# Altium PCB PCB1.PcbDoc
Units mil, origin at the board's own origin, x right, y up, seen from the top; angles counter-clockwise.
Board outline 2740 x 1570 mil, 2 copper layers (Top Layer, Bottom Layer); 18 components, 21 nets, 53 pads, 6 vias.
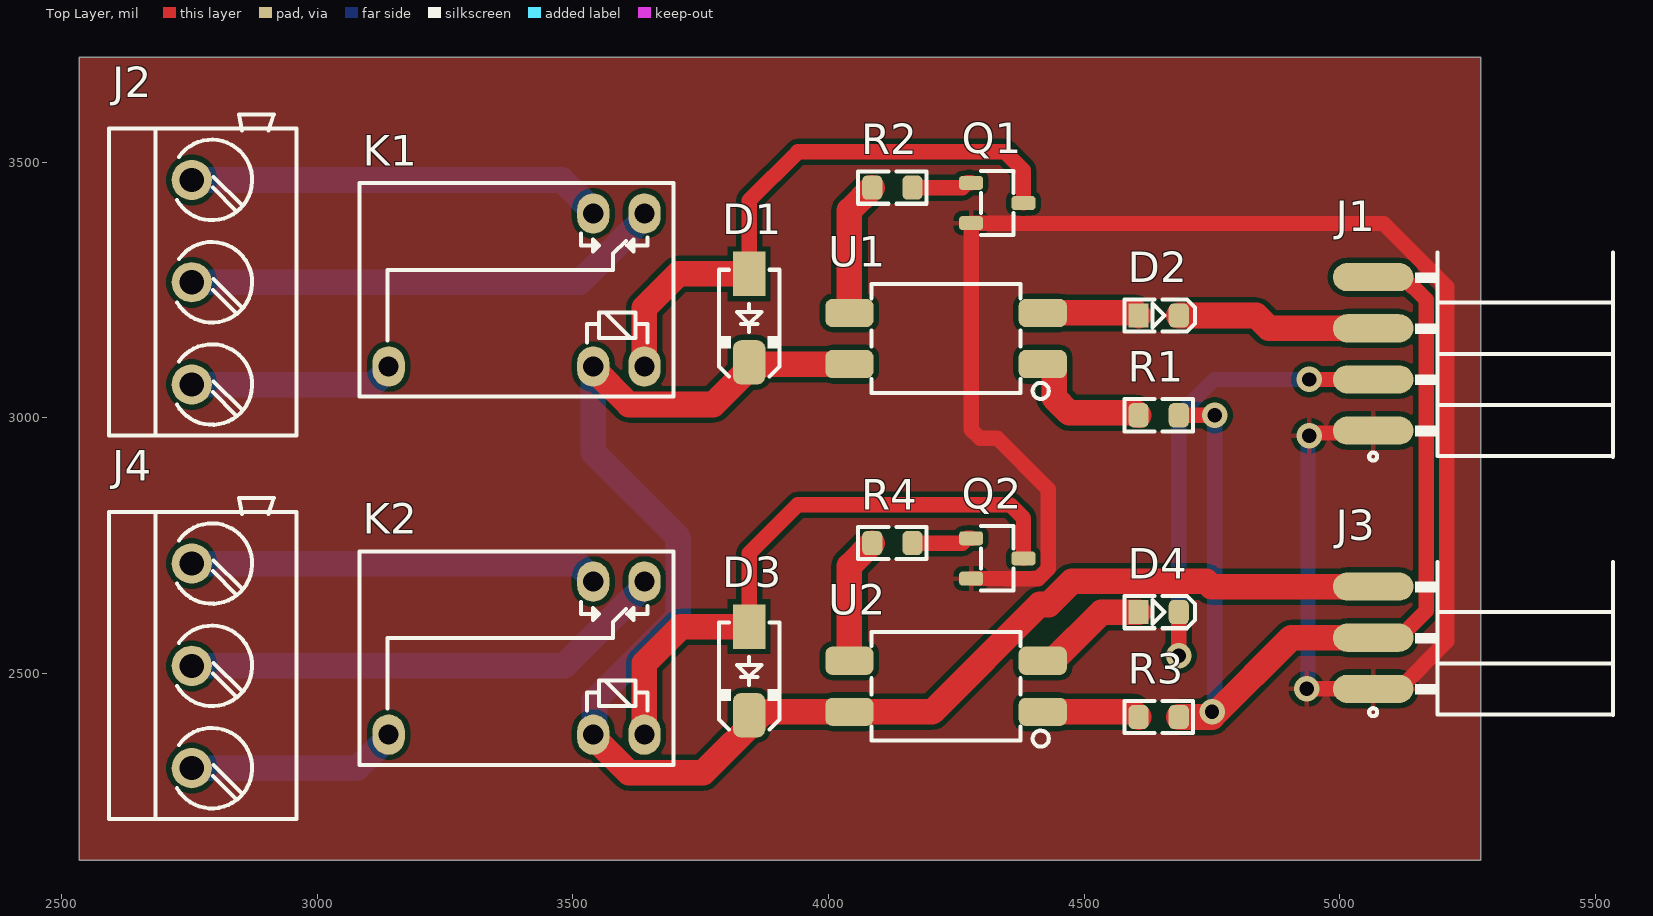
[diagram p0: Top Layer view]
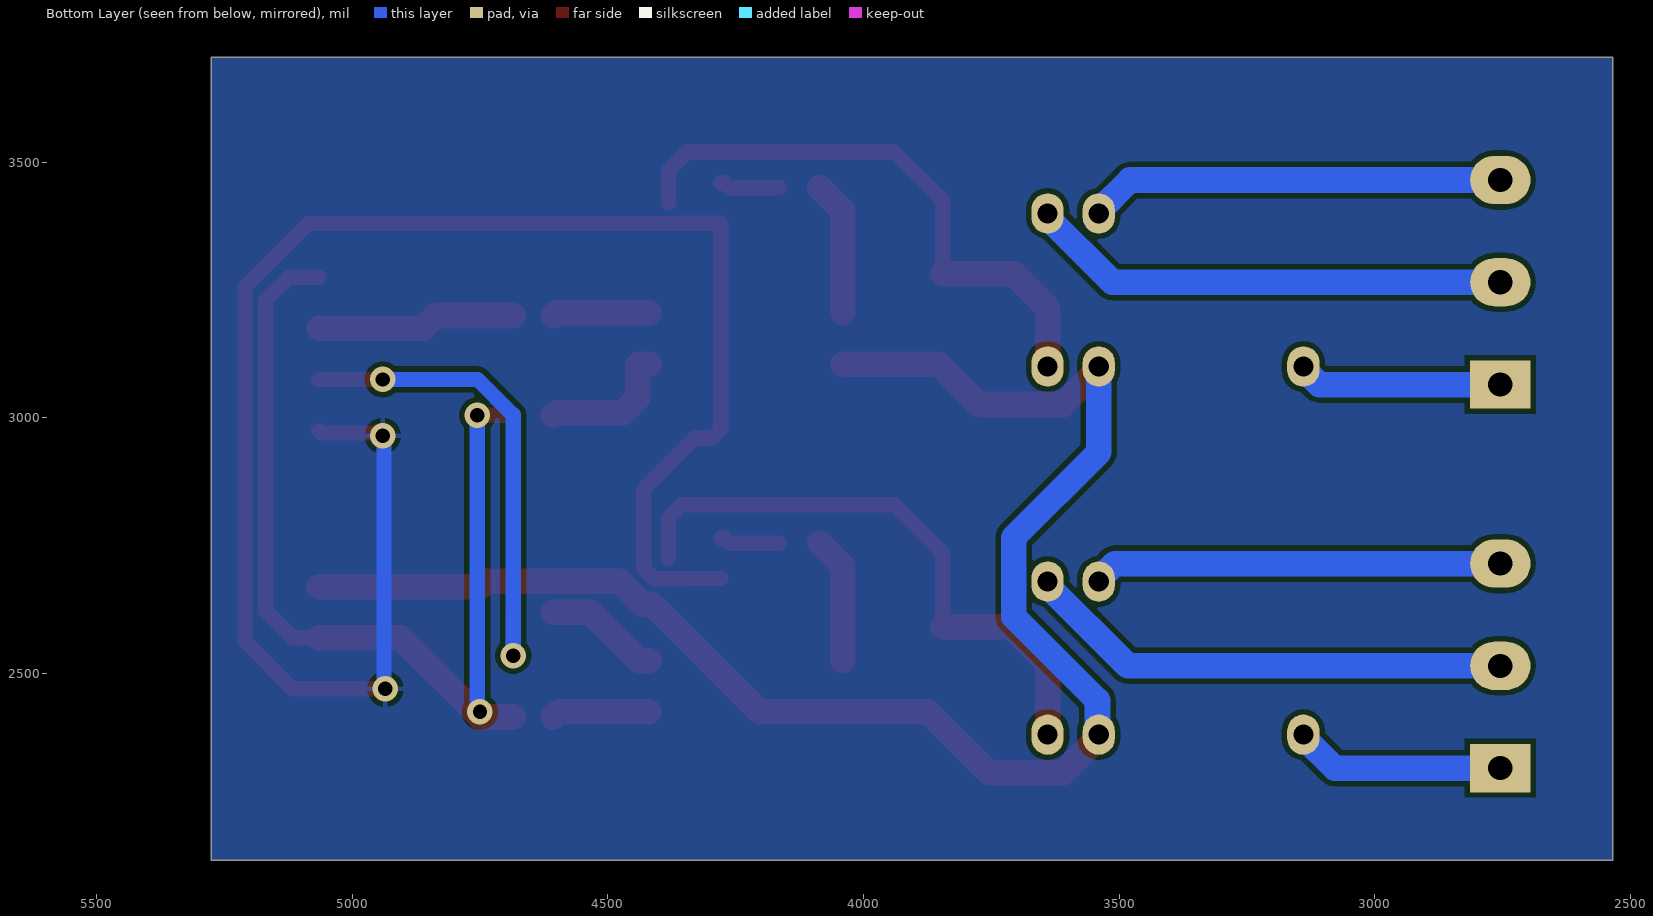
[diagram p1: Bottom Layer view, seen from below]

## Layer stack, top to bottom
Top Solder: solder mask 0.4, Solder Resist, Dk 3.5
Top Layer: signal copper 1.4
Dielectric 1: dielectric 12.6, FR-4, Dk 4.8
Bottom Layer: signal copper 1.4
Bottom Solder: solder mask 0.4, Solder Resist, Dk 3.5

## Board outline
2535,2135 5275,2135 5275,3705 2535,3705

## Design rules (kind name [scope] priority, off if disabled: settings)
Clearance [All] p1: gap=10 ignorepadtopadclearanceinfootprint=FALSE
PolygonConnect [All] p1: connectstyle=Relief reliefconductorwidth=10 reliefentries=4 polygonreliefangle="90 Angle" airgapwidth=10
RoutingVias [All] p1: holewidth=28 width=50 viastyle="Through Hole" minholewidth=28 minwidth=50 maxholewidth=28 maxwidth=50
SolderMaskExpansion [All] p1: expansion=4 istentingtop=FALSE
SupplyNets "Schematic Supply Nets" [InNet('GND')] p1: voltage=0.000
Width [All] p1: maxlimit=50 minlimit=10 preferedwidth=30 minimp=50.000000 maximp=50.000000 favimp=50.000000
30 further rules are at their usual default settings.

## Components (designator, comment, footprint, x,y, rotation, side; value= is the part's Value field where it differs from the comment)
D1 "1N4003" D_SMA 3845,3195 r270 top
D2 "LED805WHT" LED0805WHT 4645.63,3200 r0 top
D3 "1N4003" D_SMA 3845,2505 r270 top
D4 "LED805WHT" LED0805WHT 4645.63,2620 r0 top
J1 "HDRF4" HDRRS_F_1X4 5065,3125 r270 top
J2 "CONN_TB3" TBB_3 2755,3265 r90 top
J3 "HDRF3" HDRRS_F_1X3 5065,2570 r270 top
J4 "CONN_TB3" TBB_3 2755,2515 r90 top
K1 "RELAY_SPDT" REL_SPDT_5_1611 3390,3250 r90 top
K2 "RELAY_SPDT" REL_SPDT_5_1611 3390,2530 r90 top
Q1 "MMBTA42" SOT23_3 4330,3420 r0 top
Q2 "MMBTA42" SOT23_3 4330,2725 r0 top
R1 "1K0" R0805 4645.63,3005 r0 top
R2 "512 ohms" R0805 4125,3450 r0 top
R3 "1K0" R0805 4645.63,2415 r0 top
R4 "512 ohms" R0805 4125,2755 r0 top
U1 "EL817" DIP_4SMD 4230,3155 r180 top
U2 "EL817" DIP_4SMD 4230,2475 r180 top

## Footprints (in the part's own frame and the unit in brackets; to place one, negate y for a bottom-side part, rotate by r counter-clockwise, add the part's x,y. Pads: shape width x height; smd on the part's side, far side on the other; paste and mask are expansions set on the pad)
D_SMA [mm] "SMA Molded Diode, 2-Leads, Body 4.3x2.7mm, SOD-128"
  rect 2.2x1.6 smd paste-0.1: 1(-2.2,0)
  rrect50% 2.2x1.6 smd paste-0.1: 2(2.2,0)
  silkscreen extent -2.4,-1.5 2.9,1.5, body extent -2.75,-1.4 2.75,1.4, height 2.6
DIP_4SMD [mm] "DIP4, pitch 2.54mm, 300mil Width SMD"
  rrect50% 2.4x1.4 smd: 1(-4.8,1.27) 2(-4.8,-1.27) 3(4.8,-1.27) 4(4.8,1.27)
  silkscreen extent -5.1,-2.7 3.7,3, body extent -5.23,-2.55 5.23,2.55, height 4.6
HDRRS_F_1X3 [mm] "Connector; Header; 3 Position"
  oval 1.4x4 smd mask+0.1: 1(2.54,0) 2(0,0) 3(-2.54,0)
  silkscreen extent -3.77,-0.2 3.9,11.9, body extent -4.08,-1.7 3.96,11.8, height 2.58
HDRRS_F_1X4 [mm] "Connector; Header; 4 Position"
  oval 1.4x4 smd mask+0.1: 1(3.81,0) 2(1.27,0) 3(-1.27,0) 4(-3.81,0)
  silkscreen extent -5.04,-0.2 5.3,11.9, body extent -5.33,-1.7 5.33,11.8, height 2.58
LED0805WHT [mm] "LED SMD 0805, WHITE"
  rect 1x1.2 smd paste-2 mask+0.075: 1(-1,0)
  rrect50% 1x1.2 smd paste-2 mask+0.075: 2(1,0)
  Top Layer pour cut-out: -0.5,0.8 0.5,0.8 0.5,-0.8 -0.5,-0.8
  silkscreen extent -1.7,-0.8 1.8,0.8, body extent -1,-0.63 1,0.63, height 0.7
R0805 [mm] "CHIP RESISTOR 1/8 WATT ,2.0X1.3mm, 0805, 2012"
  rrect50% 1x1.2 smd paste-0.1 mask+0.075: 1(-1,0) 2(1,0)
  Top Layer pour cut-out: -0.5,0.8 0.5,0.8 0.5,-0.8 -0.5,-0.8
  silkscreen extent -1.7,-0.8 1.7,0.8, body extent -1.15,-0.67 1.15,0.68, height 0.76
REL_SPDT_5_1611 [mm] "RELAY, SPDT, 15.7X11X12mm, TRBS"
  oval 2x1.6 hole 1: 1(-3.8,6.35) 2(3.8,-6.35) 3(3.8,-3.81) 4(-3.8,-3.81) 5(-3.8,-6.35)
  silkscreen extent -5.3,-7.8 5.3,7.8, body extent -5.2,-7.7 5.2,7.7, height 11.81
SOT23_3 [mm] "SOT-23, Micro3, MO-178, TO-236AB, MO-193C, SuperSOT3, SC-59, 1.5x3mm, Pitch 1.9mm"
  rrect50% 1.2x0.7 smd paste-0.05 mask+0.1: 1(-1.3,1) 2(-1.3,-1) 3(1.3,0)
  silkscreen extent -0.8,-1.6 0.8,1.6, body extent -1.32,-1.5 1.32,1.5, height 1.08
TBB_3 [mm] "Terminal Block Blue"
  round 2 / inner round 2 / far side rect 2.4x3 hole 1.2: 1(-5.08,0)
  round 2 / inner round 2 / far side oval 2.4x3 hole 1.2: 2(0,0) 3(5.08,0)
  silkscreen extent -7.6,-5.2 8.34,4.1, body extent -7.49,-5.07 8.33,4, height 12.78

## Part data
D1 D3: library part DIODE_SMD_1N4003, "DIODE, GENERAL PURPOSE, 200V/1A", ASSEMBLY=ASSEMBLY, DESC=DESCRIPTION, MANF=MANF, MANF_P#=1N4003, PARAM="200V VRRM", PARAM2=1A, PRICE=PRICE
D2 D4: library part LED_SMD_0805_WHT, "LED, SMD, 0805, WHITE", ASSEMBLY=ASSEMBLY, DESC=DESCRIPTION, MANF=MANF, MANF_P#=MANF_PART#, PARAM2=2.2V, PRICE=36t@Javan
J1: library part HDRRS_F_1X4, "CONN, HEADER, Female, pitch: 2.54mm, 4POS"
J2 J4: "CONN, TERMINAL BLOCK, 5.08mm pitch"
J3: library part HDRRS_F_1X3, "CONN, HEADER, Female, pitch: 2.54mm, 3POS"
K1 K2: library part RELAY_SPDT_5_1611_TRBS, "Relay, SPDT, 5P, 15.5X11mm, TRB 125VAC/1A", MANF=TTI, MANF_P#=TRBS-6VDC-SA-CL, PARAM="12V, 17mA, 720Ohm", PARAM2="1A, 125VAC/30VDC", PRICE=-
Q1 Q2: library part NPN_MMBTA42_SOT23, "BJT, NPN, 300v, 0.5A, SMD, SOT23", MANF=ON/FAIRCHILD, MANF_P#=MMBTA42, PARAM="300v, 0.5A", PARAM2=625mW
R1 R2 R3 R4: library part RES_SMD_0805, "RESISTOR, SMD", ASSEMBLY=ASSEMBLY, DESC=DESCRIPTION, DIST#=MOUSER, MANF=-, MANF_P#=-, PARAM=-W, PARAM2=1%, PRICE="100= 0.5$"
U1 U2: library part OPTC_TR4P_EL817_SMD, "OPTOCOUPLER, TRANSISTOR, 4PIN", Package=DIP-4SMD, PARAM=IF=5mA, PARAM2="VCE = 5V", PRICE=300t@Paya

## Via types
v1: diameter 50, hole 28, Top Layer to Bottom Layer, 6 vias

## Nets (pads, with @x,y where several pads share a name; then routed paths per layer and width w, separated by ;. In a path a pad name is that pad's centre, name@x,y a point inside that pad or via, vN(x,y) a via of type N, cw(c..) or ccw(c..) an arc to the next point about the centre after c; other vN are vias at no path point)
GND: J1.1 J3.1 Q1.2 Q2.2 | length 3531.2
  Top Layer w30: Q2.2 4347.44,2685.63 4348.07,2685 4409.9,2685 4429.8,2704.9 4429.8,2860.2 4330,2960 4296.39,2960 4278.82,2977.57 Q1.2 4363.98,3380.63 4364.61,3380 5085.51,3380 5208.74,3256.77 5208.74,2562.56 5116.18,2470 J3.1 v1(4935,2470) ; v1(4940,2965) 4945.41,2965 4950.61,2970.19 5060.19,2970.19 J1.1
  Bottom Layer w30: v1(4935,2470) 4937.5,2472.5 4937.5,2962.5 v1(4940,2965)
NetD1_1: D1.1 K1.5 Q1.3 | length 1144.9
  Top Layer w30: D1.1 3845,3425 3940,3520 4345,3520 4381.18,3483.82 Q1.3
  Top Layer w50: K1.5 3640,3215 3706.61,3281.61 D1.1
NetD1_2: D1.2 D3.2 J3.3 K1.4 K2.4 U1.4 U2.4 | length 3142.4
  Top Layer w50: K2.4 3540,2376.04 3610.01,2306.02 3754.91,2306.02 3873.88,2425 U2.4 4202.75,2425 4412.75,2635 4430.61,2635 4475.61,2680 4738.53,2680 4748.53,2670 J3.3 ; K1.4 3540,3096.04 3610.01,3026.02 3774.91,3026.02 3853.88,3105 U1.4
  Bottom Layer w50: K2.4 3542.49,2382.88 3542.49,2447.49 3706.5,2611.5 3706.5,2765.76 3540,2932.26 K1.4
NetD2_1: D2.1 U1.2 | length 189.4
  Top Layer w50: U1.2 4601.26,3205 D2.1
NetD2_2: D2.2 J1.3 | length 390.4
  Top Layer w50: D2.2 4836.22,3200 4861.22,3175 J1.3
NetD3_1: D3.1 K2.5 Q2.3 | length 1182.9
  Top Layer w30: D3.1 3845,2735 3940,2830 4355,2830 4381.18,2803.82 Q2.3
  Top Layer w50: K2.5 3640,2520 3711.61,2591.61 D3.1
NetD4_1: D4.1 U2.2 | length 226.6
  Top Layer w50: U2.2 4438.66,2525 4533.66,2620 D4.1
NetD4_2: D4.2 J1.2 | length 964.4
  Top Layer w30: v1(4685,2535) D4.2 ; v1(4940,3075) J1.2
  Bottom Layer w30: v1(4685,2535) 4685,3005.71 4754.29,3075 v1(4940,3075)
NetJ1_4: J1.4 J3.2 R1.2 R3.2 | length 1945.3
  Top Layer w30: R1.2 v1(4755,3005) ; J3.2 5116.18,2570 5168.74,2622.56 5168.74,3231.26 5145,3255 5142.98,3255 5122.98,3275 J1.4
  Top Layer w50: R3.2 v1@4750,2415 ; v1@4755,2420 4905,2570 J3.2
  Bottom Layer w30: v1(4750,2425) 4755,2430 v1(4755,3005)
NetJ2_1: J2.1 K1.1 | length 402.2
  Bottom Layer w50: J2.1 3108.96,3065 3140,3096.04 K1.1
NetJ2_2: J2.2 K1.2 | length 945.4
  Bottom Layer w50: J2.2 3513.27,3265 3640,3391.73 K1.2
NetJ2_3: J2.3 K1.3 | length 814.6
  Bottom Layer w50: J2.3 3478.96,3465 3540,3403.96 K1.3
NetJ4_1: J4.1 K2.1 | length 414.6
  Bottom Layer w50: J4.1 3078.96,2315 3140,2376.04 K2.1
NetJ4_2: J4.2 K2.2 | length 957.8
  Bottom Layer w50: J4.2 3483.27,2515 3640,2671.73 K2.2
NetJ4_3: J4.3 K2.3 | length 802.2
  Bottom Layer w50: J4.3 3508.96,2715 3540,2683.96 K2.3
NetQ1_1: Q1.1 R2.2 | length 118.3
  Top Layer w30: R2.2 4262.05,3450 4271.42,3459.37 Q1.1
NetQ2_1: Q2.1 R4.2 | length 118.3
  Top Layer w30: R4.2 4262.05,2755 4271.42,2764.37 Q2.1
NetR1_1: R1.1 U1.1 | length 265.7
  Top Layer w50: U1.1 4438.66,3105 4441.22,3102.44 4441.22,3039.29 4470.51,3010 4601.26,3010 R1.1
NetR2_1: R2.1 U1.3 | length 263.5
  Top Layer w50: U1.3 4041.02,3405.39 R2.1
NetR3_1: R3.1 U2.1 | length 191.4
  Top Layer w50: U2.1 4596.26,2425 R3.1
NetR4_1: R4.1 U2.3 | length 248.5
  Top Layer w50: U2.3 4041.02,2710.39 R4.1

## Polygon pours and split planes (outlines as drawn)
GND on Top Layer "GND_L01_P000" (solid, pour order 0): 2535,2135 5275,2135 5275,3705 2535,3705
GND on Bottom Layer "GND_L02_P001" (solid, pour order 1): 2535,2135 5275,2135 5275,3705 2535,3705